# Altium PCB ProPrj_HTXStudio_OneHanded_Keyboard.PcbDoc (part 2 of 11)
Units mm, origin at the board's own origin, x right, y up, seen from the top; angles counter-clockwise.
Board outline 152.4 x 101.6 mm, 20 copper layers (F.Cu, F.Mask, B.Cu, B.Mask, In1.Cu, F.SilkS, In2.Cu, B.SilkS, F.Adhes, B.Adhes, F.Paste, B.Paste, Dwgs.User, Cmts.User, Eco1.User, Eco2.User, Edge.Cuts, Margin, B.CrtYd, F.CrtYd); 269 components, 0 nets, 747 pads, 1168 vias.
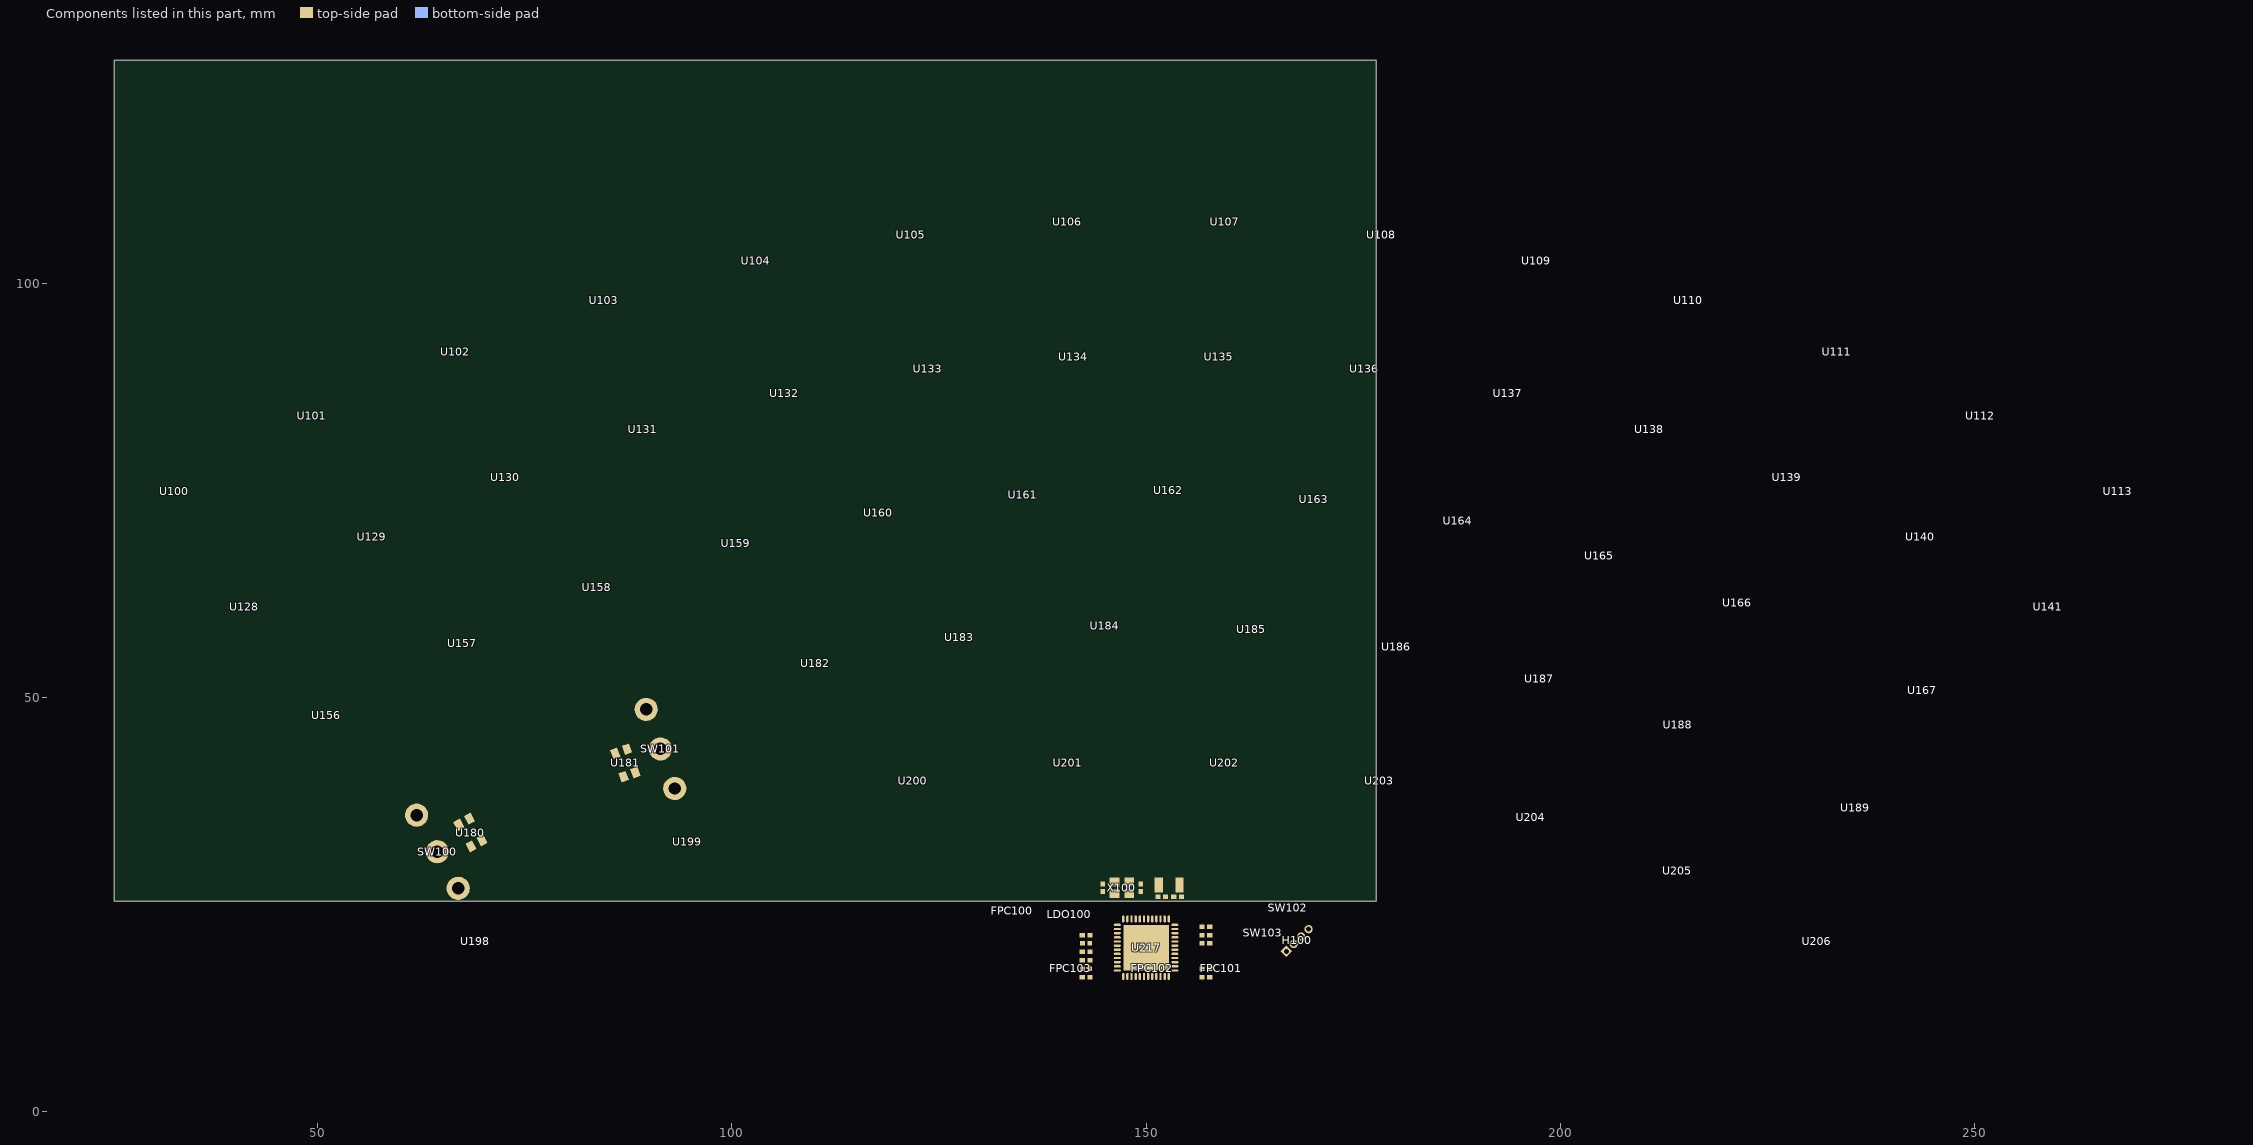
[diagram p14: the components of this part, seen from the top]

## Design rules (kind name [scope] priority, off if disabled: settings) (continued)
PolygonConnect Polygon_In2.Cu--58_ConnectDirect [IsNamedPolygon('In2.Cu--58') vs IsVia] p193: connectstyle=Direct reliefconductorwidth=0.254 reliefentries=4 polygonreliefangle="90 Angle" airgapwidth=0.254
PolygonConnect Polygon_In2.Cu--58_ConnectRelief45 [IsNamedPolygon('In2.Cu--58') vs (IsThruPin or IsSMTPin) and (PadShape_AllLayers = 'Round')] p194: connectstyle=Relief reliefconductorwidth=0.254 reliefentries=4 polygonreliefangle="45 Angle" airgapwidth=0.254
PolygonConnect Polygon_In2.Cu--58_ConnectRelief90 [IsNamedPolygon('In2.Cu--58') vs (IsThruPin or IsSMTPin) and (PadShape_AllLayers <> 'Round')] p195: connectstyle=Relief reliefconductorwidth=0.254 reliefentries=4 polygonreliefangle="90 Angle" airgapwidth=0.254
PolygonConnect Polygon_In2.Cu--57_ConnectDirect [IsNamedPolygon('In2.Cu--57') vs IsVia] p196: connectstyle=Direct reliefconductorwidth=0.254 reliefentries=4 polygonreliefangle="90 Angle" airgapwidth=0.254
PolygonConnect Polygon_In2.Cu--57_ConnectRelief45 [IsNamedPolygon('In2.Cu--57') vs (IsThruPin or IsSMTPin) and (PadShape_AllLayers = 'Round')] p197: connectstyle=Relief reliefconductorwidth=0.254 reliefentries=4 polygonreliefangle="45 Angle" airgapwidth=0.254
PolygonConnect Polygon_In2.Cu--57_ConnectRelief90 [IsNamedPolygon('In2.Cu--57') vs (IsThruPin or IsSMTPin) and (PadShape_AllLayers <> 'Round')] p198: connectstyle=Relief reliefconductorwidth=0.254 reliefentries=4 polygonreliefangle="90 Angle" airgapwidth=0.254
PolygonConnect Polygon_In2.Cu--56_ConnectDirect [IsNamedPolygon('In2.Cu--56') vs IsVia] p199: connectstyle=Direct reliefconductorwidth=0.254 reliefentries=4 polygonreliefangle="90 Angle" airgapwidth=0.254
PolygonConnect Polygon_In2.Cu--56_ConnectRelief45 [IsNamedPolygon('In2.Cu--56') vs (IsThruPin or IsSMTPin) and (PadShape_AllLayers = 'Round')] p200: connectstyle=Relief reliefconductorwidth=0.254 reliefentries=4 polygonreliefangle="45 Angle" airgapwidth=0.254
PolygonConnect Polygon_In2.Cu--56_ConnectRelief90 [IsNamedPolygon('In2.Cu--56') vs (IsThruPin or IsSMTPin) and (PadShape_AllLayers <> 'Round')] p201: connectstyle=Relief reliefconductorwidth=0.254 reliefentries=4 polygonreliefangle="90 Angle" airgapwidth=0.254
PolygonConnect Polygon_In2.Cu--55_ConnectDirect [IsNamedPolygon('In2.Cu--55') vs IsVia] p202: connectstyle=Direct reliefconductorwidth=0.254 reliefentries=4 polygonreliefangle="90 Angle" airgapwidth=0.254
PolygonConnect Polygon_In2.Cu--55_ConnectRelief45 [IsNamedPolygon('In2.Cu--55') vs (IsThruPin or IsSMTPin) and (PadShape_AllLayers = 'Round')] p203: connectstyle=Relief reliefconductorwidth=0.254 reliefentries=4 polygonreliefangle="45 Angle" airgapwidth=0.254
PolygonConnect Polygon_In2.Cu--55_ConnectRelief90 [IsNamedPolygon('In2.Cu--55') vs (IsThruPin or IsSMTPin) and (PadShape_AllLayers <> 'Round')] p204: connectstyle=Relief reliefconductorwidth=0.254 reliefentries=4 polygonreliefangle="90 Angle" airgapwidth=0.254
PolygonConnect Polygon_In2.Cu--54_ConnectDirect [IsNamedPolygon('In2.Cu--54') vs IsVia] p205: connectstyle=Direct reliefconductorwidth=0.254 reliefentries=4 polygonreliefangle="90 Angle" airgapwidth=0.254
PolygonConnect Polygon_In2.Cu--54_ConnectRelief45 [IsNamedPolygon('In2.Cu--54') vs (IsThruPin or IsSMTPin) and (PadShape_AllLayers = 'Round')] p206: connectstyle=Relief reliefconductorwidth=0.254 reliefentries=4 polygonreliefangle="45 Angle" airgapwidth=0.254
PolygonConnect Polygon_In2.Cu--54_ConnectRelief90 [IsNamedPolygon('In2.Cu--54') vs (IsThruPin or IsSMTPin) and (PadShape_AllLayers <> 'Round')] p207: connectstyle=Relief reliefconductorwidth=0.254 reliefentries=4 polygonreliefangle="90 Angle" airgapwidth=0.254
PolygonConnect Polygon_In2.Cu--53_ConnectDirect [IsNamedPolygon('In2.Cu--53') vs IsVia] p208: connectstyle=Direct reliefconductorwidth=0.254 reliefentries=4 polygonreliefangle="90 Angle" airgapwidth=0.254
PolygonConnect Polygon_In2.Cu--53_ConnectRelief45 [IsNamedPolygon('In2.Cu--53') vs (IsThruPin or IsSMTPin) and (PadShape_AllLayers = 'Round')] p209: connectstyle=Relief reliefconductorwidth=0.254 reliefentries=4 polygonreliefangle="45 Angle" airgapwidth=0.254
PolygonConnect Polygon_In2.Cu--53_ConnectRelief90 [IsNamedPolygon('In2.Cu--53') vs (IsThruPin or IsSMTPin) and (PadShape_AllLayers <> 'Round')] p210: connectstyle=Relief reliefconductorwidth=0.254 reliefentries=4 polygonreliefangle="90 Angle" airgapwidth=0.254
PolygonConnect Polygon_In2.Cu--52_ConnectDirect [IsNamedPolygon('In2.Cu--52') vs IsVia] p211: connectstyle=Direct reliefconductorwidth=0.254 reliefentries=4 polygonreliefangle="90 Angle" airgapwidth=0.254
PolygonConnect Polygon_In2.Cu--52_ConnectRelief45 [IsNamedPolygon('In2.Cu--52') vs (IsThruPin or IsSMTPin) and (PadShape_AllLayers = 'Round')] p212: connectstyle=Relief reliefconductorwidth=0.254 reliefentries=4 polygonreliefangle="45 Angle" airgapwidth=0.254
PolygonConnect Polygon_In2.Cu--52_ConnectRelief90 [IsNamedPolygon('In2.Cu--52') vs (IsThruPin or IsSMTPin) and (PadShape_AllLayers <> 'Round')] p213: connectstyle=Relief reliefconductorwidth=0.254 reliefentries=4 polygonreliefangle="90 Angle" airgapwidth=0.254
PolygonConnect Polygon_In2.Cu--51_ConnectDirect [IsNamedPolygon('In2.Cu--51') vs IsVia] p214: connectstyle=Direct reliefconductorwidth=0.254 reliefentries=4 polygonreliefangle="90 Angle" airgapwidth=0.254
PolygonConnect Polygon_In2.Cu--51_ConnectRelief45 [IsNamedPolygon('In2.Cu--51') vs (IsThruPin or IsSMTPin) and (PadShape_AllLayers = 'Round')] p215: connectstyle=Relief reliefconductorwidth=0.254 reliefentries=4 polygonreliefangle="45 Angle" airgapwidth=0.254
PolygonConnect Polygon_In2.Cu--51_ConnectRelief90 [IsNamedPolygon('In2.Cu--51') vs (IsThruPin or IsSMTPin) and (PadShape_AllLayers <> 'Round')] p216: connectstyle=Relief reliefconductorwidth=0.254 reliefentries=4 polygonreliefangle="90 Angle" airgapwidth=0.254
PolygonConnect Polygon_In2.Cu--50_ConnectDirect [IsNamedPolygon('In2.Cu--50') vs IsVia] p217: connectstyle=Direct reliefconductorwidth=0.254 reliefentries=4 polygonreliefangle="90 Angle" airgapwidth=0.254
PolygonConnect Polygon_In2.Cu--50_ConnectRelief45 [IsNamedPolygon('In2.Cu--50') vs (IsThruPin or IsSMTPin) and (PadShape_AllLayers = 'Round')] p218: connectstyle=Relief reliefconductorwidth=0.254 reliefentries=4 polygonreliefangle="45 Angle" airgapwidth=0.254
PolygonConnect Polygon_In2.Cu--50_ConnectRelief90 [IsNamedPolygon('In2.Cu--50') vs (IsThruPin or IsSMTPin) and (PadShape_AllLayers <> 'Round')] p219: connectstyle=Relief reliefconductorwidth=0.254 reliefentries=4 polygonreliefangle="90 Angle" airgapwidth=0.254
PolygonConnect Polygon_In2.Cu--49_ConnectDirect [IsNamedPolygon('In2.Cu--49') vs IsVia] p220: connectstyle=Direct reliefconductorwidth=0.254 reliefentries=4 polygonreliefangle="90 Angle" airgapwidth=0.254
PolygonConnect Polygon_In2.Cu--49_ConnectRelief45 [IsNamedPolygon('In2.Cu--49') vs (IsThruPin or IsSMTPin) and (PadShape_AllLayers = 'Round')] p221: connectstyle=Relief reliefconductorwidth=0.254 reliefentries=4 polygonreliefangle="45 Angle" airgapwidth=0.254
PolygonConnect Polygon_In2.Cu--49_ConnectRelief90 [IsNamedPolygon('In2.Cu--49') vs (IsThruPin or IsSMTPin) and (PadShape_AllLayers <> 'Round')] p222: connectstyle=Relief reliefconductorwidth=0.254 reliefentries=4 polygonreliefangle="90 Angle" airgapwidth=0.254
PolygonConnect Polygon_In2.Cu--48_ConnectDirect [IsNamedPolygon('In2.Cu--48') vs IsVia] p223: connectstyle=Direct reliefconductorwidth=0.254 reliefentries=4 polygonreliefangle="90 Angle" airgapwidth=0.254
PolygonConnect Polygon_In2.Cu--48_ConnectRelief45 [IsNamedPolygon('In2.Cu--48') vs (IsThruPin or IsSMTPin) and (PadShape_AllLayers = 'Round')] p224: connectstyle=Relief reliefconductorwidth=0.254 reliefentries=4 polygonreliefangle="45 Angle" airgapwidth=0.254
PolygonConnect Polygon_In2.Cu--48_ConnectRelief90 [IsNamedPolygon('In2.Cu--48') vs (IsThruPin or IsSMTPin) and (PadShape_AllLayers <> 'Round')] p225: connectstyle=Relief reliefconductorwidth=0.254 reliefentries=4 polygonreliefangle="90 Angle" airgapwidth=0.254
PolygonConnect Polygon_In2.Cu--47_ConnectDirect [IsNamedPolygon('In2.Cu--47') vs IsVia] p226: connectstyle=Direct reliefconductorwidth=0.254 reliefentries=4 polygonreliefangle="90 Angle" airgapwidth=0.254
PolygonConnect Polygon_In2.Cu--47_ConnectRelief45 [IsNamedPolygon('In2.Cu--47') vs (IsThruPin or IsSMTPin) and (PadShape_AllLayers = 'Round')] p227: connectstyle=Relief reliefconductorwidth=0.254 reliefentries=4 polygonreliefangle="45 Angle" airgapwidth=0.254
PolygonConnect Polygon_In2.Cu--47_ConnectRelief90 [IsNamedPolygon('In2.Cu--47') vs (IsThruPin or IsSMTPin) and (PadShape_AllLayers <> 'Round')] p228: connectstyle=Relief reliefconductorwidth=0.254 reliefentries=4 polygonreliefangle="90 Angle" airgapwidth=0.254
PolygonConnect Polygon_In2.Cu--46_ConnectDirect [IsNamedPolygon('In2.Cu--46') vs IsVia] p229: connectstyle=Direct reliefconductorwidth=0.254 reliefentries=4 polygonreliefangle="90 Angle" airgapwidth=0.254
PolygonConnect Polygon_In2.Cu--46_ConnectRelief45 [IsNamedPolygon('In2.Cu--46') vs (IsThruPin or IsSMTPin) and (PadShape_AllLayers = 'Round')] p230: connectstyle=Relief reliefconductorwidth=0.254 reliefentries=4 polygonreliefangle="45 Angle" airgapwidth=0.254
PolygonConnect Polygon_In2.Cu--46_ConnectRelief90 [IsNamedPolygon('In2.Cu--46') vs (IsThruPin or IsSMTPin) and (PadShape_AllLayers <> 'Round')] p231: connectstyle=Relief reliefconductorwidth=0.254 reliefentries=4 polygonreliefangle="90 Angle" airgapwidth=0.254
PolygonConnect Polygon_In2.Cu--45_ConnectDirect [IsNamedPolygon('In2.Cu--45') vs IsVia] p232: connectstyle=Direct reliefconductorwidth=0.254 reliefentries=4 polygonreliefangle="90 Angle" airgapwidth=0.254
PolygonConnect Polygon_In2.Cu--45_ConnectRelief45 [IsNamedPolygon('In2.Cu--45') vs (IsThruPin or IsSMTPin) and (PadShape_AllLayers = 'Round')] p233: connectstyle=Relief reliefconductorwidth=0.254 reliefentries=4 polygonreliefangle="45 Angle" airgapwidth=0.254
PolygonConnect Polygon_In2.Cu--45_ConnectRelief90 [IsNamedPolygon('In2.Cu--45') vs (IsThruPin or IsSMTPin) and (PadShape_AllLayers <> 'Round')] p234: connectstyle=Relief reliefconductorwidth=0.254 reliefentries=4 polygonreliefangle="90 Angle" airgapwidth=0.254
PolygonConnect Polygon_In2.Cu--44_ConnectDirect [IsNamedPolygon('In2.Cu--44') vs IsVia] p235: connectstyle=Direct reliefconductorwidth=0.254 reliefentries=4 polygonreliefangle="90 Angle" airgapwidth=0.254
PolygonConnect Polygon_In2.Cu--44_ConnectRelief45 [IsNamedPolygon('In2.Cu--44') vs (IsThruPin or IsSMTPin) and (PadShape_AllLayers = 'Round')] p236: connectstyle=Relief reliefconductorwidth=0.254 reliefentries=4 polygonreliefangle="45 Angle" airgapwidth=0.254
PolygonConnect Polygon_In2.Cu--44_ConnectRelief90 [IsNamedPolygon('In2.Cu--44') vs (IsThruPin or IsSMTPin) and (PadShape_AllLayers <> 'Round')] p237: connectstyle=Relief reliefconductorwidth=0.254 reliefentries=4 polygonreliefangle="90 Angle" airgapwidth=0.254
PolygonConnect Polygon_In2.Cu--43_ConnectDirect [IsNamedPolygon('In2.Cu--43') vs IsVia] p238: connectstyle=Direct reliefconductorwidth=0.254 reliefentries=4 polygonreliefangle="90 Angle" airgapwidth=0.254
PolygonConnect Polygon_In2.Cu--43_ConnectRelief45 [IsNamedPolygon('In2.Cu--43') vs (IsThruPin or IsSMTPin) and (PadShape_AllLayers = 'Round')] p239: connectstyle=Relief reliefconductorwidth=0.254 reliefentries=4 polygonreliefangle="45 Angle" airgapwidth=0.254
PolygonConnect Polygon_In2.Cu--43_ConnectRelief90 [IsNamedPolygon('In2.Cu--43') vs (IsThruPin or IsSMTPin) and (PadShape_AllLayers <> 'Round')] p240: connectstyle=Relief reliefconductorwidth=0.254 reliefentries=4 polygonreliefangle="90 Angle" airgapwidth=0.254
PolygonConnect Polygon_In2.Cu--42_ConnectDirect [IsNamedPolygon('In2.Cu--42') vs IsVia] p241: connectstyle=Direct reliefconductorwidth=0.254 reliefentries=4 polygonreliefangle="90 Angle" airgapwidth=0.254
PolygonConnect Polygon_In2.Cu--42_ConnectRelief45 [IsNamedPolygon('In2.Cu--42') vs (IsThruPin or IsSMTPin) and (PadShape_AllLayers = 'Round')] p242: connectstyle=Relief reliefconductorwidth=0.254 reliefentries=4 polygonreliefangle="45 Angle" airgapwidth=0.254
PolygonConnect Polygon_In2.Cu--42_ConnectRelief90 [IsNamedPolygon('In2.Cu--42') vs (IsThruPin or IsSMTPin) and (PadShape_AllLayers <> 'Round')] p243: connectstyle=Relief reliefconductorwidth=0.254 reliefentries=4 polygonreliefangle="90 Angle" airgapwidth=0.254
PolygonConnect Polygon_In2.Cu--41_ConnectDirect [IsNamedPolygon('In2.Cu--41') vs IsVia] p244: connectstyle=Direct reliefconductorwidth=0.254 reliefentries=4 polygonreliefangle="90 Angle" airgapwidth=0.254
PolygonConnect Polygon_In2.Cu--41_ConnectRelief45 [IsNamedPolygon('In2.Cu--41') vs (IsThruPin or IsSMTPin) and (PadShape_AllLayers = 'Round')] p245: connectstyle=Relief reliefconductorwidth=0.254 reliefentries=4 polygonreliefangle="45 Angle" airgapwidth=0.254
PolygonConnect Polygon_In2.Cu--41_ConnectRelief90 [IsNamedPolygon('In2.Cu--41') vs (IsThruPin or IsSMTPin) and (PadShape_AllLayers <> 'Round')] p246: connectstyle=Relief reliefconductorwidth=0.254 reliefentries=4 polygonreliefangle="90 Angle" airgapwidth=0.254
PolygonConnect Polygon_In2.Cu--40_ConnectDirect [IsNamedPolygon('In2.Cu--40') vs IsVia] p247: connectstyle=Direct reliefconductorwidth=0.254 reliefentries=4 polygonreliefangle="90 Angle" airgapwidth=0.254
PolygonConnect Polygon_In2.Cu--40_ConnectRelief45 [IsNamedPolygon('In2.Cu--40') vs (IsThruPin or IsSMTPin) and (PadShape_AllLayers = 'Round')] p248: connectstyle=Relief reliefconductorwidth=0.254 reliefentries=4 polygonreliefangle="45 Angle" airgapwidth=0.254
PolygonConnect Polygon_In2.Cu--40_ConnectRelief90 [IsNamedPolygon('In2.Cu--40') vs (IsThruPin or IsSMTPin) and (PadShape_AllLayers <> 'Round')] p249: connectstyle=Relief reliefconductorwidth=0.254 reliefentries=4 polygonreliefangle="90 Angle" airgapwidth=0.254
PolygonConnect Polygon_In2.Cu--39_ConnectDirect [IsNamedPolygon('In2.Cu--39') vs IsVia] p250: connectstyle=Direct reliefconductorwidth=0.254 reliefentries=4 polygonreliefangle="90 Angle" airgapwidth=0.254
PolygonConnect Polygon_In2.Cu--39_ConnectRelief45 [IsNamedPolygon('In2.Cu--39') vs (IsThruPin or IsSMTPin) and (PadShape_AllLayers = 'Round')] p251: connectstyle=Relief reliefconductorwidth=0.254 reliefentries=4 polygonreliefangle="45 Angle" airgapwidth=0.254
PolygonConnect Polygon_In2.Cu--39_ConnectRelief90 [IsNamedPolygon('In2.Cu--39') vs (IsThruPin or IsSMTPin) and (PadShape_AllLayers <> 'Round')] p252: connectstyle=Relief reliefconductorwidth=0.254 reliefentries=4 polygonreliefangle="90 Angle" airgapwidth=0.254
PolygonConnect Polygon_In2.Cu--38_ConnectDirect [IsNamedPolygon('In2.Cu--38') vs IsVia] p253: connectstyle=Direct reliefconductorwidth=0.254 reliefentries=4 polygonreliefangle="90 Angle" airgapwidth=0.254
PolygonConnect Polygon_In2.Cu--38_ConnectRelief45 [IsNamedPolygon('In2.Cu--38') vs (IsThruPin or IsSMTPin) and (PadShape_AllLayers = 'Round')] p254: connectstyle=Relief reliefconductorwidth=0.254 reliefentries=4 polygonreliefangle="45 Angle" airgapwidth=0.254
PolygonConnect Polygon_In2.Cu--38_ConnectRelief90 [IsNamedPolygon('In2.Cu--38') vs (IsThruPin or IsSMTPin) and (PadShape_AllLayers <> 'Round')] p255: connectstyle=Relief reliefconductorwidth=0.254 reliefentries=4 polygonreliefangle="90 Angle" airgapwidth=0.254
PolygonConnect Polygon_In2.Cu--37_ConnectDirect [IsNamedPolygon('In2.Cu--37') vs IsVia] p256: connectstyle=Direct reliefconductorwidth=0.254 reliefentries=4 polygonreliefangle="90 Angle" airgapwidth=0.254
PolygonConnect Polygon_In2.Cu--37_ConnectRelief45 [IsNamedPolygon('In2.Cu--37') vs (IsThruPin or IsSMTPin) and (PadShape_AllLayers = 'Round')] p257: connectstyle=Relief reliefconductorwidth=0.254 reliefentries=4 polygonreliefangle="45 Angle" airgapwidth=0.254
PolygonConnect Polygon_In2.Cu--37_ConnectRelief90 [IsNamedPolygon('In2.Cu--37') vs (IsThruPin or IsSMTPin) and (PadShape_AllLayers <> 'Round')] p258: connectstyle=Relief reliefconductorwidth=0.254 reliefentries=4 polygonreliefangle="90 Angle" airgapwidth=0.254
PolygonConnect Polygon_In2.Cu--36_ConnectDirect [IsNamedPolygon('In2.Cu--36') vs IsVia] p259: connectstyle=Direct reliefconductorwidth=0.254 reliefentries=4 polygonreliefangle="90 Angle" airgapwidth=0.254
PolygonConnect Polygon_In2.Cu--36_ConnectRelief45 [IsNamedPolygon('In2.Cu--36') vs (IsThruPin or IsSMTPin) and (PadShape_AllLayers = 'Round')] p260: connectstyle=Relief reliefconductorwidth=0.254 reliefentries=4 polygonreliefangle="45 Angle" airgapwidth=0.254
PolygonConnect Polygon_In2.Cu--36_ConnectRelief90 [IsNamedPolygon('In2.Cu--36') vs (IsThruPin or IsSMTPin) and (PadShape_AllLayers <> 'Round')] p261: connectstyle=Relief reliefconductorwidth=0.254 reliefentries=4 polygonreliefangle="90 Angle" airgapwidth=0.254
PolygonConnect Polygon_In2.Cu--35_ConnectDirect [IsNamedPolygon('In2.Cu--35') vs IsVia] p262: connectstyle=Direct reliefconductorwidth=0.254 reliefentries=4 polygonreliefangle="90 Angle" airgapwidth=0.254
PolygonConnect Polygon_In2.Cu--35_ConnectRelief45 [IsNamedPolygon('In2.Cu--35') vs (IsThruPin or IsSMTPin) and (PadShape_AllLayers = 'Round')] p263: connectstyle=Relief reliefconductorwidth=0.254 reliefentries=4 polygonreliefangle="45 Angle" airgapwidth=0.254
PolygonConnect Polygon_In2.Cu--35_ConnectRelief90 [IsNamedPolygon('In2.Cu--35') vs (IsThruPin or IsSMTPin) and (PadShape_AllLayers <> 'Round')] p264: connectstyle=Relief reliefconductorwidth=0.254 reliefentries=4 polygonreliefangle="90 Angle" airgapwidth=0.254
PolygonConnect Polygon_In2.Cu--34_ConnectDirect [IsNamedPolygon('In2.Cu--34') vs IsVia] p265: connectstyle=Direct reliefconductorwidth=0.254 reliefentries=4 polygonreliefangle="90 Angle" airgapwidth=0.254
PolygonConnect Polygon_In2.Cu--34_ConnectRelief45 [IsNamedPolygon('In2.Cu--34') vs (IsThruPin or IsSMTPin) and (PadShape_AllLayers = 'Round')] p266: connectstyle=Relief reliefconductorwidth=0.5 reliefentries=4 polygonreliefangle="45 Angle" airgapwidth=0.5
PolygonConnect Polygon_In2.Cu--34_ConnectRelief90 [IsNamedPolygon('In2.Cu--34') vs (IsThruPin or IsSMTPin) and (PadShape_AllLayers <> 'Round')] p267: connectstyle=Relief reliefconductorwidth=0.5 reliefentries=4 polygonreliefangle="90 Angle" airgapwidth=0.5
PolygonConnect Polygon_In2.Cu--33_ConnectDirect [IsNamedPolygon('In2.Cu--33') vs IsVia] p268: connectstyle=Direct reliefconductorwidth=0.254 reliefentries=4 polygonreliefangle="90 Angle" airgapwidth=0.254
PolygonConnect Polygon_In2.Cu--33_ConnectRelief45 [IsNamedPolygon('In2.Cu--33') vs (IsThruPin or IsSMTPin) and (PadShape_AllLayers = 'Round')] p269: connectstyle=Relief reliefconductorwidth=0.254 reliefentries=4 polygonreliefangle="45 Angle" airgapwidth=0.254
PolygonConnect Polygon_In2.Cu--33_ConnectRelief90 [IsNamedPolygon('In2.Cu--33') vs (IsThruPin or IsSMTPin) and (PadShape_AllLayers <> 'Round')] p270: connectstyle=Relief reliefconductorwidth=0.254 reliefentries=4 polygonreliefangle="90 Angle" airgapwidth=0.254
PolygonConnect Polygon_In2.Cu--32_ConnectDirect [IsNamedPolygon('In2.Cu--32') vs IsVia] p271: connectstyle=Direct reliefconductorwidth=0.254 reliefentries=4 polygonreliefangle="90 Angle" airgapwidth=0.254
PolygonConnect Polygon_In2.Cu--32_ConnectRelief45 [IsNamedPolygon('In2.Cu--32') vs (IsThruPin or IsSMTPin) and (PadShape_AllLayers = 'Round')] p272: connectstyle=Relief reliefconductorwidth=0.254 reliefentries=4 polygonreliefangle="45 Angle" airgapwidth=0.254
PolygonConnect Polygon_In2.Cu--32_ConnectRelief90 [IsNamedPolygon('In2.Cu--32') vs (IsThruPin or IsSMTPin) and (PadShape_AllLayers <> 'Round')] p273: connectstyle=Relief reliefconductorwidth=0.254 reliefentries=4 polygonreliefangle="90 Angle" airgapwidth=0.254
PolygonConnect Polygon_In2.Cu--31_ConnectDirect [IsNamedPolygon('In2.Cu--31') vs IsVia] p274: connectstyle=Direct reliefconductorwidth=0.254 reliefentries=4 polygonreliefangle="90 Angle" airgapwidth=0.254
PolygonConnect Polygon_In2.Cu--31_ConnectRelief45 [IsNamedPolygon('In2.Cu--31') vs (IsThruPin or IsSMTPin) and (PadShape_AllLayers = 'Round')] p275: connectstyle=Relief reliefconductorwidth=0.254 reliefentries=4 polygonreliefangle="45 Angle" airgapwidth=0.254
PolygonConnect Polygon_In2.Cu--31_ConnectRelief90 [IsNamedPolygon('In2.Cu--31') vs (IsThruPin or IsSMTPin) and (PadShape_AllLayers <> 'Round')] p276: connectstyle=Relief reliefconductorwidth=0.254 reliefentries=4 polygonreliefangle="90 Angle" airgapwidth=0.254
PolygonConnect Polygon_In2.Cu--30_ConnectDirect [IsNamedPolygon('In2.Cu--30') vs IsVia] p277: connectstyle=Direct reliefconductorwidth=0.254 reliefentries=4 polygonreliefangle="90 Angle" airgapwidth=0.254
PolygonConnect Polygon_In2.Cu--30_ConnectRelief45 [IsNamedPolygon('In2.Cu--30') vs (IsThruPin or IsSMTPin) and (PadShape_AllLayers = 'Round')] p278: connectstyle=Relief reliefconductorwidth=0.254 reliefentries=4 polygonreliefangle="45 Angle" airgapwidth=0.254
PolygonConnect Polygon_In2.Cu--30_ConnectRelief90 [IsNamedPolygon('In2.Cu--30') vs (IsThruPin or IsSMTPin) and (PadShape_AllLayers <> 'Round')] p279: connectstyle=Relief reliefconductorwidth=0.254 reliefentries=4 polygonreliefangle="90 Angle" airgapwidth=0.254
PolygonConnect Polygon_In2.Cu--29_ConnectDirect [IsNamedPolygon('In2.Cu--29') vs IsVia] p280: connectstyle=Direct reliefconductorwidth=0.254 reliefentries=4 polygonreliefangle="90 Angle" airgapwidth=0.254
PolygonConnect Polygon_In2.Cu--29_ConnectRelief45 [IsNamedPolygon('In2.Cu--29') vs (IsThruPin or IsSMTPin) and (PadShape_AllLayers = 'Round')] p281: connectstyle=Relief reliefconductorwidth=0.254 reliefentries=4 polygonreliefangle="45 Angle" airgapwidth=0.254
PolygonConnect Polygon_In2.Cu--29_ConnectRelief90 [IsNamedPolygon('In2.Cu--29') vs (IsThruPin or IsSMTPin) and (PadShape_AllLayers <> 'Round')] p282: connectstyle=Relief reliefconductorwidth=0.254 reliefentries=4 polygonreliefangle="90 Angle" airgapwidth=0.254
PolygonConnect Polygon_In2.Cu--28_ConnectDirect [IsNamedPolygon('In2.Cu--28') vs IsVia] p283: connectstyle=Direct reliefconductorwidth=0.254 reliefentries=4 polygonreliefangle="90 Angle" airgapwidth=0.254
PolygonConnect Polygon_In2.Cu--28_ConnectRelief45 [IsNamedPolygon('In2.Cu--28') vs (IsThruPin or IsSMTPin) and (PadShape_AllLayers = 'Round')] p284: connectstyle=Relief reliefconductorwidth=0.254 reliefentries=4 polygonreliefangle="45 Angle" airgapwidth=0.254
PolygonConnect Polygon_In2.Cu--28_ConnectRelief90 [IsNamedPolygon('In2.Cu--28') vs (IsThruPin or IsSMTPin) and (PadShape_AllLayers <> 'Round')] p285: connectstyle=Relief reliefconductorwidth=0.254 reliefentries=4 polygonreliefangle="90 Angle" airgapwidth=0.254
PolygonConnect Polygon_In2.Cu--27_ConnectDirect [IsNamedPolygon('In2.Cu--27') vs IsVia] p286: connectstyle=Direct reliefconductorwidth=0.254 reliefentries=4 polygonreliefangle="90 Angle" airgapwidth=0.254
PolygonConnect Polygon_In2.Cu--27_ConnectRelief45 [IsNamedPolygon('In2.Cu--27') vs (IsThruPin or IsSMTPin) and (PadShape_AllLayers = 'Round')] p287: connectstyle=Relief reliefconductorwidth=0.254 reliefentries=4 polygonreliefangle="45 Angle" airgapwidth=0.254
PolygonConnect Polygon_In2.Cu--27_ConnectRelief90 [IsNamedPolygon('In2.Cu--27') vs (IsThruPin or IsSMTPin) and (PadShape_AllLayers <> 'Round')] p288: connectstyle=Relief reliefconductorwidth=0.254 reliefentries=4 polygonreliefangle="90 Angle" airgapwidth=0.254
PolygonConnect Polygon_In2.Cu--26_ConnectDirect [IsNamedPolygon('In2.Cu--26') vs IsVia] p289: connectstyle=Direct reliefconductorwidth=0.254 reliefentries=4 polygonreliefangle="90 Angle" airgapwidth=0.254
PolygonConnect Polygon_In2.Cu--26_ConnectRelief45 [IsNamedPolygon('In2.Cu--26') vs (IsThruPin or IsSMTPin) and (PadShape_AllLayers = 'Round')] p290: connectstyle=Relief reliefconductorwidth=0.254 reliefentries=4 polygonreliefangle="45 Angle" airgapwidth=0.254
PolygonConnect Polygon_In2.Cu--26_ConnectRelief90 [IsNamedPolygon('In2.Cu--26') vs (IsThruPin or IsSMTPin) and (PadShape_AllLayers <> 'Round')] p291: connectstyle=Relief reliefconductorwidth=0.254 reliefentries=4 polygonreliefangle="90 Angle" airgapwidth=0.254
PolygonConnect Polygon_In2.Cu--25_ConnectDirect [IsNamedPolygon('In2.Cu--25') vs IsVia] p292: connectstyle=Direct reliefconductorwidth=0.254 reliefentries=4 polygonreliefangle="90 Angle" airgapwidth=0.254
PolygonConnect Polygon_In2.Cu--25_ConnectRelief45 [IsNamedPolygon('In2.Cu--25') vs (IsThruPin or IsSMTPin) and (PadShape_AllLayers = 'Round')] p293: connectstyle=Relief reliefconductorwidth=0.254 reliefentries=4 polygonreliefangle="45 Angle" airgapwidth=0.254
PolygonConnect Polygon_In2.Cu--25_ConnectRelief90 [IsNamedPolygon('In2.Cu--25') vs (IsThruPin or IsSMTPin) and (PadShape_AllLayers <> 'Round')] p294: connectstyle=Relief reliefconductorwidth=0.254 reliefentries=4 polygonreliefangle="90 Angle" airgapwidth=0.254
PolygonConnect Polygon_In2.Cu--24_ConnectDirect [IsNamedPolygon('In2.Cu--24') vs IsVia] p295: connectstyle=Direct reliefconductorwidth=0.254 reliefentries=4 polygonreliefangle="90 Angle" airgapwidth=0.254
PolygonConnect Polygon_In2.Cu--24_ConnectRelief45 [IsNamedPolygon('In2.Cu--24') vs (IsThruPin or IsSMTPin) and (PadShape_AllLayers = 'Round')] p296: connectstyle=Relief reliefconductorwidth=0.254 reliefentries=4 polygonreliefangle="45 Angle" airgapwidth=0.254
PolygonConnect Polygon_In2.Cu--24_ConnectRelief90 [IsNamedPolygon('In2.Cu--24') vs (IsThruPin or IsSMTPin) and (PadShape_AllLayers <> 'Round')] p297: connectstyle=Relief reliefconductorwidth=0.254 reliefentries=4 polygonreliefangle="90 Angle" airgapwidth=0.254
PolygonConnect Polygon_In2.Cu--23_ConnectDirect [IsNamedPolygon('In2.Cu--23') vs IsVia] p298: connectstyle=Direct reliefconductorwidth=0.254 reliefentries=4 polygonreliefangle="90 Angle" airgapwidth=0.254
PolygonConnect Polygon_In2.Cu--23_ConnectRelief45 [IsNamedPolygon('In2.Cu--23') vs (IsThruPin or IsSMTPin) and (PadShape_AllLayers = 'Round')] p299: connectstyle=Relief reliefconductorwidth=0.254 reliefentries=4 polygonreliefangle="45 Angle" airgapwidth=0.254
PolygonConnect Polygon_In2.Cu--23_ConnectRelief90 [IsNamedPolygon('In2.Cu--23') vs (IsThruPin or IsSMTPin) and (PadShape_AllLayers <> 'Round')] p300: connectstyle=Relief reliefconductorwidth=0.254 reliefentries=4 polygonreliefangle="90 Angle" airgapwidth=0.254
PolygonConnect Polygon_In2.Cu--22_ConnectDirect [IsNamedPolygon('In2.Cu--22') vs IsVia] p301: connectstyle=Direct reliefconductorwidth=0.254 reliefentries=4 polygonreliefangle="90 Angle" airgapwidth=0.254
PolygonConnect Polygon_In2.Cu--22_ConnectRelief45 [IsNamedPolygon('In2.Cu--22') vs (IsThruPin or IsSMTPin) and (PadShape_AllLayers = 'Round')] p302: connectstyle=Relief reliefconductorwidth=0.254 reliefentries=4 polygonreliefangle="45 Angle" airgapwidth=0.254
PolygonConnect Polygon_In2.Cu--22_ConnectRelief90 [IsNamedPolygon('In2.Cu--22') vs (IsThruPin or IsSMTPin) and (PadShape_AllLayers <> 'Round')] p303: connectstyle=Relief reliefconductorwidth=0.254 reliefentries=4 polygonreliefangle="90 Angle" airgapwidth=0.254
PolygonConnect Polygon_In2.Cu--21_ConnectDirect [IsNamedPolygon('In2.Cu--21') vs IsVia] p304: connectstyle=Direct reliefconductorwidth=0.254 reliefentries=4 polygonreliefangle="90 Angle" airgapwidth=0.254
PolygonConnect Polygon_In2.Cu--21_ConnectRelief45 [IsNamedPolygon('In2.Cu--21') vs (IsThruPin or IsSMTPin) and (PadShape_AllLayers = 'Round')] p305: connectstyle=Relief reliefconductorwidth=0.254 reliefentries=4 polygonreliefangle="45 Angle" airgapwidth=0.254
PolygonConnect Polygon_In2.Cu--21_ConnectRelief90 [IsNamedPolygon('In2.Cu--21') vs (IsThruPin or IsSMTPin) and (PadShape_AllLayers <> 'Round')] p306: connectstyle=Relief reliefconductorwidth=0.254 reliefentries=4 polygonreliefangle="90 Angle" airgapwidth=0.254
PolygonConnect Polygon_In2.Cu--20_ConnectDirect [IsNamedPolygon('In2.Cu--20') vs IsVia] p307: connectstyle=Direct reliefconductorwidth=0.254 reliefentries=4 polygonreliefangle="90 Angle" airgapwidth=0.254
PolygonConnect Polygon_In2.Cu--20_ConnectRelief45 [IsNamedPolygon('In2.Cu--20') vs (IsThruPin or IsSMTPin) and (PadShape_AllLayers = 'Round')] p308: connectstyle=Relief reliefconductorwidth=0.254 reliefentries=4 polygonreliefangle="45 Angle" airgapwidth=0.254
PolygonConnect Polygon_In2.Cu--20_ConnectRelief90 [IsNamedPolygon('In2.Cu--20') vs (IsThruPin or IsSMTPin) and (PadShape_AllLayers <> 'Round')] p309: connectstyle=Relief reliefconductorwidth=0.254 reliefentries=4 polygonreliefangle="90 Angle" airgapwidth=0.254
PolygonConnect Polygon_In2.Cu--19_ConnectDirect [IsNamedPolygon('In2.Cu--19') vs IsVia] p310: connectstyle=Direct reliefconductorwidth=0.254 reliefentries=4 polygonreliefangle="90 Angle" airgapwidth=0.254
PolygonConnect Polygon_In2.Cu--19_ConnectRelief45 [IsNamedPolygon('In2.Cu--19') vs (IsThruPin or IsSMTPin) and (PadShape_AllLayers = 'Round')] p311: connectstyle=Relief reliefconductorwidth=0.254 reliefentries=4 polygonreliefangle="45 Angle" airgapwidth=0.254
PolygonConnect Polygon_In2.Cu--19_ConnectRelief90 [IsNamedPolygon('In2.Cu--19') vs (IsThruPin or IsSMTPin) and (PadShape_AllLayers <> 'Round')] p312: connectstyle=Relief reliefconductorwidth=0.254 reliefentries=4 polygonreliefangle="90 Angle" airgapwidth=0.254
PolygonConnect Polygon_In2.Cu--18_ConnectDirect [IsNamedPolygon('In2.Cu--18') vs IsVia] p313: connectstyle=Direct reliefconductorwidth=0.254 reliefentries=4 polygonreliefangle="90 Angle" airgapwidth=0.254
PolygonConnect Polygon_In2.Cu--18_ConnectRelief45 [IsNamedPolygon('In2.Cu--18') vs (IsThruPin or IsSMTPin) and (PadShape_AllLayers = 'Round')] p314: connectstyle=Relief reliefconductorwidth=0.254 reliefentries=4 polygonreliefangle="45 Angle" airgapwidth=0.254
PolygonConnect Polygon_In2.Cu--18_ConnectRelief90 [IsNamedPolygon('In2.Cu--18') vs (IsThruPin or IsSMTPin) and (PadShape_AllLayers <> 'Round')] p315: connectstyle=Relief reliefconductorwidth=0.254 reliefentries=4 polygonreliefangle="90 Angle" airgapwidth=0.254
PolygonConnect Polygon_In2.Cu--17_ConnectDirect [IsNamedPolygon('In2.Cu--17') vs IsVia] p316: connectstyle=Direct reliefconductorwidth=0.254 reliefentries=4 polygonreliefangle="90 Angle" airgapwidth=0.254
PolygonConnect Polygon_In2.Cu--17_ConnectRelief45 [IsNamedPolygon('In2.Cu--17') vs (IsThruPin or IsSMTPin) and (PadShape_AllLayers = 'Round')] p317: connectstyle=Relief reliefconductorwidth=0.254 reliefentries=4 polygonreliefangle="45 Angle" airgapwidth=0.254
PolygonConnect Polygon_In2.Cu--17_ConnectRelief90 [IsNamedPolygon('In2.Cu--17') vs (IsThruPin or IsSMTPin) and (PadShape_AllLayers <> 'Round')] p318: connectstyle=Relief reliefconductorwidth=0.254 reliefentries=4 polygonreliefangle="90 Angle" airgapwidth=0.254
PolygonConnect Polygon_In2.Cu--16_ConnectDirect [IsNamedPolygon('In2.Cu--16') vs IsVia] p319: connectstyle=Direct reliefconductorwidth=0.254 reliefentries=4 polygonreliefangle="90 Angle" airgapwidth=0.254
PolygonConnect Polygon_In2.Cu--16_ConnectRelief45 [IsNamedPolygon('In2.Cu--16') vs (IsThruPin or IsSMTPin) and (PadShape_AllLayers = 'Round')] p320: connectstyle=Relief reliefconductorwidth=0.254 reliefentries=4 polygonreliefangle="45 Angle" airgapwidth=0.254
PolygonConnect Polygon_In2.Cu--16_ConnectRelief90 [IsNamedPolygon('In2.Cu--16') vs (IsThruPin or IsSMTPin) and (PadShape_AllLayers <> 'Round')] p321: connectstyle=Relief reliefconductorwidth=0.254 reliefentries=4 polygonreliefangle="90 Angle" airgapwidth=0.254
PolygonConnect Polygon_In2.Cu--15_ConnectDirect [IsNamedPolygon('In2.Cu--15') vs IsVia] p322: connectstyle=Direct reliefconductorwidth=0.254 reliefentries=4 polygonreliefangle="90 Angle" airgapwidth=0.254
PolygonConnect Polygon_In2.Cu--15_ConnectRelief45 [IsNamedPolygon('In2.Cu--15') vs (IsThruPin or IsSMTPin) and (PadShape_AllLayers = 'Round')] p323: connectstyle=Relief reliefconductorwidth=0.254 reliefentries=4 polygonreliefangle="45 Angle" airgapwidth=0.254
PolygonConnect Polygon_In2.Cu--15_ConnectRelief90 [IsNamedPolygon('In2.Cu--15') vs (IsThruPin or IsSMTPin) and (PadShape_AllLayers <> 'Round')] p324: connectstyle=Relief reliefconductorwidth=0.254 reliefentries=4 polygonreliefangle="90 Angle" airgapwidth=0.254
PolygonConnect Polygon_In2.Cu--14_ConnectDirect [IsNamedPolygon('In2.Cu--14') vs IsVia] p325: connectstyle=Direct reliefconductorwidth=0.254 reliefentries=4 polygonreliefangle="90 Angle" airgapwidth=0.254
PolygonConnect Polygon_In2.Cu--14_ConnectRelief45 [IsNamedPolygon('In2.Cu--14') vs (IsThruPin or IsSMTPin) and (PadShape_AllLayers = 'Round')] p326: connectstyle=Relief reliefconductorwidth=0.254 reliefentries=4 polygonreliefangle="45 Angle" airgapwidth=0.254
PolygonConnect Polygon_In2.Cu--14_ConnectRelief90 [IsNamedPolygon('In2.Cu--14') vs (IsThruPin or IsSMTPin) and (PadShape_AllLayers <> 'Round')] p327: connectstyle=Relief reliefconductorwidth=0.254 reliefentries=4 polygonreliefangle="90 Angle" airgapwidth=0.254
PolygonConnect Polygon_In2.Cu--13_ConnectDirect [IsNamedPolygon('In2.Cu--13') vs IsVia] p328: connectstyle=Direct reliefconductorwidth=0.254 reliefentries=4 polygonreliefangle="90 Angle" airgapwidth=0.254
PolygonConnect Polygon_In2.Cu--13_ConnectRelief45 [IsNamedPolygon('In2.Cu--13') vs (IsThruPin or IsSMTPin) and (PadShape_AllLayers = 'Round')] p329: connectstyle=Relief reliefconductorwidth=0.254 reliefentries=4 polygonreliefangle="45 Angle" airgapwidth=0.254
PolygonConnect Polygon_In2.Cu--13_ConnectRelief90 [IsNamedPolygon('In2.Cu--13') vs (IsThruPin or IsSMTPin) and (PadShape_AllLayers <> 'Round')] p330: connectstyle=Relief reliefconductorwidth=0.254 reliefentries=4 polygonreliefangle="90 Angle" airgapwidth=0.254
PolygonConnect Polygon_In2.Cu--12_ConnectDirect [IsNamedPolygon('In2.Cu--12') vs IsVia] p331: connectstyle=Direct reliefconductorwidth=0.254 reliefentries=4 polygonreliefangle="90 Angle" airgapwidth=0.254
PolygonConnect Polygon_In2.Cu--12_ConnectRelief45 [IsNamedPolygon('In2.Cu--12') vs (IsThruPin or IsSMTPin) and (PadShape_AllLayers = 'Round')] p332: connectstyle=Relief reliefconductorwidth=0.254 reliefentries=4 polygonreliefangle="45 Angle" airgapwidth=0.254
PolygonConnect Polygon_In2.Cu--12_ConnectRelief90 [IsNamedPolygon('In2.Cu--12') vs (IsThruPin or IsSMTPin) and (PadShape_AllLayers <> 'Round')] p333: connectstyle=Relief reliefconductorwidth=0.254 reliefentries=4 polygonreliefangle="90 Angle" airgapwidth=0.254
PolygonConnect Polygon_In2.Cu--11_ConnectDirect [IsNamedPolygon('In2.Cu--11') vs IsVia] p334: connectstyle=Direct reliefconductorwidth=0.254 reliefentries=4 polygonreliefangle="90 Angle" airgapwidth=0.254
PolygonConnect Polygon_In2.Cu--11_ConnectRelief45 [IsNamedPolygon('In2.Cu--11') vs (IsThruPin or IsSMTPin) and (PadShape_AllLayers = 'Round')] p335: connectstyle=Relief reliefconductorwidth=0.254 reliefentries=4 polygonreliefangle="45 Angle" airgapwidth=0.254
PolygonConnect Polygon_In2.Cu--11_ConnectRelief90 [IsNamedPolygon('In2.Cu--11') vs (IsThruPin or IsSMTPin) and (PadShape_AllLayers <> 'Round')] p336: connectstyle=Relief reliefconductorwidth=0.254 reliefentries=4 polygonreliefangle="90 Angle" airgapwidth=0.254
PolygonConnect Polygon_In2.Cu--10_ConnectDirect [IsNamedPolygon('In2.Cu--10') vs IsVia] p337: connectstyle=Direct reliefconductorwidth=0.254 reliefentries=4 polygonreliefangle="90 Angle" airgapwidth=0.254
PolygonConnect Polygon_In2.Cu--10_ConnectRelief45 [IsNamedPolygon('In2.Cu--10') vs (IsThruPin or IsSMTPin) and (PadShape_AllLayers = 'Round')] p338: connectstyle=Relief reliefconductorwidth=0.254 reliefentries=4 polygonreliefangle="45 Angle" airgapwidth=0.254
PolygonConnect Polygon_In2.Cu--10_ConnectRelief90 [IsNamedPolygon('In2.Cu--10') vs (IsThruPin or IsSMTPin) and (PadShape_AllLayers <> 'Round')] p339: connectstyle=Relief reliefconductorwidth=0.254 reliefentries=4 polygonreliefangle="90 Angle" airgapwidth=0.254
PolygonConnect Polygon_In2.Cu--9_ConnectDirect [IsNamedPolygon('In2.Cu--9') vs IsVia] p340: connectstyle=Direct reliefconductorwidth=0.254 reliefentries=4 polygonreliefangle="90 Angle" airgapwidth=0.254
PolygonConnect Polygon_In2.Cu--9_ConnectRelief45 [IsNamedPolygon('In2.Cu--9') vs (IsThruPin or IsSMTPin) and (PadShape_AllLayers = 'Round')] p341: connectstyle=Relief reliefconductorwidth=0.254 reliefentries=4 polygonreliefangle="45 Angle" airgapwidth=0.254
PolygonConnect Polygon_In2.Cu--9_ConnectRelief90 [IsNamedPolygon('In2.Cu--9') vs (IsThruPin or IsSMTPin) and (PadShape_AllLayers <> 'Round')] p342: connectstyle=Relief reliefconductorwidth=0.254 reliefentries=4 polygonreliefangle="90 Angle" airgapwidth=0.254
PolygonConnect Polygon_In2.Cu--8_ConnectDirect [IsNamedPolygon('In2.Cu--8') vs IsVia] p343: connectstyle=Direct reliefconductorwidth=0.254 reliefentries=4 polygonreliefangle="90 Angle" airgapwidth=0.254
PolygonConnect Polygon_In2.Cu--8_ConnectRelief45 [IsNamedPolygon('In2.Cu--8') vs (IsThruPin or IsSMTPin) and (PadShape_AllLayers = 'Round')] p344: connectstyle=Relief reliefconductorwidth=0.254 reliefentries=4 polygonreliefangle="45 Angle" airgapwidth=0.254
PolygonConnect Polygon_In2.Cu--8_ConnectRelief90 [IsNamedPolygon('In2.Cu--8') vs (IsThruPin or IsSMTPin) and (PadShape_AllLayers <> 'Round')] p345: connectstyle=Relief reliefconductorwidth=0.254 reliefentries=4 polygonreliefangle="90 Angle" airgapwidth=0.254
PolygonConnect Polygon_In2.Cu--7_ConnectDirect [IsNamedPolygon('In2.Cu--7') vs IsVia] p346: connectstyle=Direct reliefconductorwidth=0.254 reliefentries=4 polygonreliefangle="90 Angle" airgapwidth=0.254
PolygonConnect Polygon_In2.Cu--7_ConnectRelief45 [IsNamedPolygon('In2.Cu--7') vs (IsThruPin or IsSMTPin) and (PadShape_AllLayers = 'Round')] p347: connectstyle=Relief reliefconductorwidth=0.254 reliefentries=4 polygonreliefangle="45 Angle" airgapwidth=0.254
PolygonConnect Polygon_In2.Cu--7_ConnectRelief90 [IsNamedPolygon('In2.Cu--7') vs (IsThruPin or IsSMTPin) and (PadShape_AllLayers <> 'Round')] p348: connectstyle=Relief reliefconductorwidth=0.254 reliefentries=4 polygonreliefangle="90 Angle" airgapwidth=0.254
PolygonConnect Polygon_In2.Cu--6_ConnectDirect [IsNamedPolygon('In2.Cu--6') vs IsVia] p349: connectstyle=Direct reliefconductorwidth=0.254 reliefentries=4 polygonreliefangle="90 Angle" airgapwidth=0.254
PolygonConnect Polygon_In2.Cu--6_ConnectRelief45 [IsNamedPolygon('In2.Cu--6') vs (IsThruPin or IsSMTPin) and (PadShape_AllLayers = 'Round')] p350: connectstyle=Relief reliefconductorwidth=0.254 reliefentries=4 polygonreliefangle="45 Angle" airgapwidth=0.254
PolygonConnect Polygon_In2.Cu--6_ConnectRelief90 [IsNamedPolygon('In2.Cu--6') vs (IsThruPin or IsSMTPin) and (PadShape_AllLayers <> 'Round')] p351: connectstyle=Relief reliefconductorwidth=0.254 reliefentries=4 polygonreliefangle="90 Angle" airgapwidth=0.254
PolygonConnect Polygon_In2.Cu--5_ConnectDirect [IsNamedPolygon('In2.Cu--5') vs IsVia] p352: connectstyle=Direct reliefconductorwidth=0.254 reliefentries=4 polygonreliefangle="90 Angle" airgapwidth=0.254
PolygonConnect Polygon_In2.Cu--5_ConnectRelief45 [IsNamedPolygon('In2.Cu--5') vs (IsThruPin or IsSMTPin) and (PadShape_AllLayers = 'Round')] p353: connectstyle=Relief reliefconductorwidth=0.254 reliefentries=4 polygonreliefangle="45 Angle" airgapwidth=0.254
PolygonConnect Polygon_In2.Cu--5_ConnectRelief90 [IsNamedPolygon('In2.Cu--5') vs (IsThruPin or IsSMTPin) and (PadShape_AllLayers <> 'Round')] p354: connectstyle=Relief reliefconductorwidth=0.254 reliefentries=4 polygonreliefangle="90 Angle" airgapwidth=0.254
PolygonConnect Polygon_In2.Cu--4_ConnectDirect [IsNamedPolygon('In2.Cu--4') vs IsVia] p355: connectstyle=Direct reliefconductorwidth=0.254 reliefentries=4 polygonreliefangle="90 Angle" airgapwidth=0.254
PolygonConnect Polygon_In2.Cu--4_ConnectRelief45 [IsNamedPolygon('In2.Cu--4') vs (IsThruPin or IsSMTPin) and (PadShape_AllLayers = 'Round')] p356: connectstyle=Relief reliefconductorwidth=0.254 reliefentries=4 polygonreliefangle="45 Angle" airgapwidth=0.254
PolygonConnect Polygon_In2.Cu--4_ConnectRelief90 [IsNamedPolygon('In2.Cu--4') vs (IsThruPin or IsSMTPin) and (PadShape_AllLayers <> 'Round')] p357: connectstyle=Relief reliefconductorwidth=0.254 reliefentries=4 polygonreliefangle="90 Angle" airgapwidth=0.254
PolygonConnect Polygon_In2.Cu--3_ConnectDirect [IsNamedPolygon('In2.Cu--3') vs IsVia] p358: connectstyle=Direct reliefconductorwidth=0.254 reliefentries=4 polygonreliefangle="90 Angle" airgapwidth=0.254
PolygonConnect Polygon_In2.Cu--3_ConnectRelief45 [IsNamedPolygon('In2.Cu--3') vs (IsThruPin or IsSMTPin) and (PadShape_AllLayers = 'Round')] p359: connectstyle=Relief reliefconductorwidth=0.254 reliefentries=4 polygonreliefangle="45 Angle" airgapwidth=0.254
PolygonConnect Polygon_In2.Cu--3_ConnectRelief90 [IsNamedPolygon('In2.Cu--3') vs (IsThruPin or IsSMTPin) and (PadShape_AllLayers <> 'Round')] p360: connectstyle=Relief reliefconductorwidth=0.254 reliefentries=4 polygonreliefangle="90 Angle" airgapwidth=0.254
PolygonConnect Polygon_In2.Cu--2_ConnectDirect [IsNamedPolygon('In2.Cu--2') vs IsVia] p361: connectstyle=Direct reliefconductorwidth=0.254 reliefentries=4 polygonreliefangle="90 Angle" airgapwidth=0.254
PolygonConnect Polygon_In2.Cu--2_ConnectRelief45 [IsNamedPolygon('In2.Cu--2') vs (IsThruPin or IsSMTPin) and (PadShape_AllLayers = 'Round')] p362: connectstyle=Relief reliefconductorwidth=0.254 reliefentries=4 polygonreliefangle="45 Angle" airgapwidth=0.254
PolygonConnect Polygon_In2.Cu--2_ConnectRelief90 [IsNamedPolygon('In2.Cu--2') vs (IsThruPin or IsSMTPin) and (PadShape_AllLayers <> 'Round')] p363: connectstyle=Relief reliefconductorwidth=0.254 reliefentries=4 polygonreliefangle="90 Angle" airgapwidth=0.254
PolygonConnect Polygon_In2.Cu--1_ConnectDirect [IsNamedPolygon('In2.Cu--1') vs IsVia] p364: connectstyle=Direct reliefconductorwidth=0.254 reliefentries=4 polygonreliefangle="90 Angle" airgapwidth=0.254
PolygonConnect Polygon_In2.Cu--1_ConnectRelief45 [IsNamedPolygon('In2.Cu--1') vs (IsThruPin or IsSMTPin) and (PadShape_AllLayers = 'Round')] p365: connectstyle=Relief reliefconductorwidth=0.254 reliefentries=4 polygonreliefangle="45 Angle" airgapwidth=0.254
PolygonConnect Polygon_In2.Cu--1_ConnectRelief90 [IsNamedPolygon('In2.Cu--1') vs (IsThruPin or IsSMTPin) and (PadShape_AllLayers <> 'Round')] p366: connectstyle=Relief reliefconductorwidth=0.254 reliefentries=4 polygonreliefangle="90 Angle" airgapwidth=0.254
PolygonConnect Polygon_In2.Cu-_ConnectDirect [IsNamedPolygon('In2.Cu-') vs IsVia] p367: connectstyle=Direct reliefconductorwidth=0.254 reliefentries=4 polygonreliefangle="90 Angle" airgapwidth=0.254
PolygonConnect Polygon_In2.Cu-_ConnectRelief45 [IsNamedPolygon('In2.Cu-') vs (IsThruPin or IsSMTPin) and (PadShape_AllLayers = 'Round')] p368: connectstyle=Relief reliefconductorwidth=0.254 reliefentries=4 polygonreliefangle="45 Angle" airgapwidth=0.254
PolygonConnect Polygon_In2.Cu-_ConnectRelief90 [IsNamedPolygon('In2.Cu-') vs (IsThruPin or IsSMTPin) and (PadShape_AllLayers <> 'Round')] p369: connectstyle=Relief reliefconductorwidth=0.254 reliefentries=4 polygonreliefangle="90 Angle" airgapwidth=0.254
PolygonConnect Polygon_In1.Cu-_ConnectDirect [IsNamedPolygon('In1.Cu-') vs IsVia] p370: connectstyle=Direct reliefconductorwidth=0.254 reliefentries=4 polygonreliefangle="90 Angle" airgapwidth=0.254
PolygonConnect Polygon_In1.Cu-_ConnectRelief45 [IsNamedPolygon('In1.Cu-') vs (IsThruPin or IsSMTPin) and (PadShape_AllLayers = 'Round')] p371: connectstyle=Relief reliefconductorwidth=0.5 reliefentries=4 polygonreliefangle="45 Angle" airgapwidth=0.5
PolygonConnect Polygon_In1.Cu-_ConnectRelief90 [IsNamedPolygon('In1.Cu-') vs (IsThruPin or IsSMTPin) and (PadShape_AllLayers <> 'Round')] p372: connectstyle=Relief reliefconductorwidth=0.5 reliefentries=4 polygonreliefangle="90 Angle" airgapwidth=0.5
PolygonConnect Polygon_B.Cu--233_ConnectDirect [IsNamedPolygon('B.Cu--233') vs IsVia] p373: connectstyle=Direct reliefconductorwidth=0.254 reliefentries=4 polygonreliefangle="90 Angle" airgapwidth=0.254
PolygonConnect Polygon_B.Cu--233_ConnectRelief45 [IsNamedPolygon('B.Cu--233') vs (IsThruPin or IsSMTPin) and (PadShape_AllLayers = 'Round')] p374: connectstyle=Relief reliefconductorwidth=0.254 reliefentries=4 polygonreliefangle="45 Angle" airgapwidth=0.254
PolygonConnect Polygon_B.Cu--233_ConnectRelief90 [IsNamedPolygon('B.Cu--233') vs (IsThruPin or IsSMTPin) and (PadShape_AllLayers <> 'Round')] p375: connectstyle=Relief reliefconductorwidth=0.254 reliefentries=4 polygonreliefangle="90 Angle" airgapwidth=0.254
PolygonConnect Polygon_B.Cu--232_ConnectDirect [IsNamedPolygon('B.Cu--232') vs IsVia] p376: connectstyle=Direct reliefconductorwidth=0.254 reliefentries=4 polygonreliefangle="90 Angle" airgapwidth=0.254
PolygonConnect Polygon_B.Cu--232_ConnectRelief45 [IsNamedPolygon('B.Cu--232') vs (IsThruPin or IsSMTPin) and (PadShape_AllLayers = 'Round')] p377: connectstyle=Relief reliefconductorwidth=0.254 reliefentries=4 polygonreliefangle="45 Angle" airgapwidth=0.254
PolygonConnect Polygon_B.Cu--232_ConnectRelief90 [IsNamedPolygon('B.Cu--232') vs (IsThruPin or IsSMTPin) and (PadShape_AllLayers <> 'Round')] p378: connectstyle=Relief reliefconductorwidth=0.254 reliefentries=4 polygonreliefangle="90 Angle" airgapwidth=0.254
PolygonConnect Polygon_B.Cu--231_ConnectDirect [IsNamedPolygon('B.Cu--231') vs IsVia] p379: connectstyle=Direct reliefconductorwidth=0.254 reliefentries=4 polygonreliefangle="90 Angle" airgapwidth=0.254
PolygonConnect Polygon_B.Cu--231_ConnectRelief45 [IsNamedPolygon('B.Cu--231') vs (IsThruPin or IsSMTPin) and (PadShape_AllLayers = 'Round')] p380: connectstyle=Relief reliefconductorwidth=0.254 reliefentries=4 polygonreliefangle="45 Angle" airgapwidth=0.254
PolygonConnect Polygon_B.Cu--231_ConnectRelief90 [IsNamedPolygon('B.Cu--231') vs (IsThruPin or IsSMTPin) and (PadShape_AllLayers <> 'Round')] p381: connectstyle=Relief reliefconductorwidth=0.254 reliefentries=4 polygonreliefangle="90 Angle" airgapwidth=0.254
PolygonConnect Polygon_B.Cu--230_ConnectDirect [IsNamedPolygon('B.Cu--230') vs IsVia] p382: connectstyle=Direct reliefconductorwidth=0.254 reliefentries=4 polygonreliefangle="90 Angle" airgapwidth=0.254
PolygonConnect Polygon_B.Cu--230_ConnectRelief45 [IsNamedPolygon('B.Cu--230') vs (IsThruPin or IsSMTPin) and (PadShape_AllLayers = 'Round')] p383: connectstyle=Relief reliefconductorwidth=0.254 reliefentries=4 polygonreliefangle="45 Angle" airgapwidth=0.254
PolygonConnect Polygon_B.Cu--230_ConnectRelief90 [IsNamedPolygon('B.Cu--230') vs (IsThruPin or IsSMTPin) and (PadShape_AllLayers <> 'Round')] p384: connectstyle=Relief reliefconductorwidth=0.254 reliefentries=4 polygonreliefangle="90 Angle" airgapwidth=0.254
PolygonConnect Polygon_B.Cu--229_ConnectDirect [IsNamedPolygon('B.Cu--229') vs IsVia] p385: connectstyle=Direct reliefconductorwidth=0.254 reliefentries=4 polygonreliefangle="90 Angle" airgapwidth=0.254
PolygonConnect Polygon_B.Cu--229_ConnectRelief45 [IsNamedPolygon('B.Cu--229') vs (IsThruPin or IsSMTPin) and (PadShape_AllLayers = 'Round')] p386: connectstyle=Relief reliefconductorwidth=0.254 reliefentries=4 polygonreliefangle="45 Angle" airgapwidth=0.254
PolygonConnect Polygon_B.Cu--229_ConnectRelief90 [IsNamedPolygon('B.Cu--229') vs (IsThruPin or IsSMTPin) and (PadShape_AllLayers <> 'Round')] p387: connectstyle=Relief reliefconductorwidth=0.254 reliefentries=4 polygonreliefangle="90 Angle" airgapwidth=0.254
PolygonConnect Polygon_B.Cu--228_ConnectDirect [IsNamedPolygon('B.Cu--228') vs IsVia] p388: connectstyle=Direct reliefconductorwidth=0.254 reliefentries=4 polygonreliefangle="90 Angle" airgapwidth=0.254
PolygonConnect Polygon_B.Cu--228_ConnectRelief45 [IsNamedPolygon('B.Cu--228') vs (IsThruPin or IsSMTPin) and (PadShape_AllLayers = 'Round')] p389: connectstyle=Relief reliefconductorwidth=0.254 reliefentries=4 polygonreliefangle="45 Angle" airgapwidth=0.254
PolygonConnect Polygon_B.Cu--228_ConnectRelief90 [IsNamedPolygon('B.Cu--228') vs (IsThruPin or IsSMTPin) and (PadShape_AllLayers <> 'Round')] p390: connectstyle=Relief reliefconductorwidth=0.254 reliefentries=4 polygonreliefangle="90 Angle" airgapwidth=0.254
PolygonConnect Polygon_B.Cu--227_ConnectDirect [IsNamedPolygon('B.Cu--227') vs IsVia] p391: connectstyle=Direct reliefconductorwidth=0.254 reliefentries=4 polygonreliefangle="90 Angle" airgapwidth=0.254
PolygonConnect Polygon_B.Cu--227_ConnectRelief45 [IsNamedPolygon('B.Cu--227') vs (IsThruPin or IsSMTPin) and (PadShape_AllLayers = 'Round')] p392: connectstyle=Relief reliefconductorwidth=0.254 reliefentries=4 polygonreliefangle="45 Angle" airgapwidth=0.254
PolygonConnect Polygon_B.Cu--227_ConnectRelief90 [IsNamedPolygon('B.Cu--227') vs (IsThruPin or IsSMTPin) and (PadShape_AllLayers <> 'Round')] p393: connectstyle=Relief reliefconductorwidth=0.254 reliefentries=4 polygonreliefangle="90 Angle" airgapwidth=0.254
PolygonConnect Polygon_B.Cu--226_ConnectDirect [IsNamedPolygon('B.Cu--226') vs IsVia] p394: connectstyle=Direct reliefconductorwidth=0.254 reliefentries=4 polygonreliefangle="90 Angle" airgapwidth=0.254
PolygonConnect Polygon_B.Cu--226_ConnectRelief45 [IsNamedPolygon('B.Cu--226') vs (IsThruPin or IsSMTPin) and (PadShape_AllLayers = 'Round')] p395: connectstyle=Relief reliefconductorwidth=0.254 reliefentries=4 polygonreliefangle="45 Angle" airgapwidth=0.254